# EAGLE board KGGR_M (EAGLE 9.4.2)
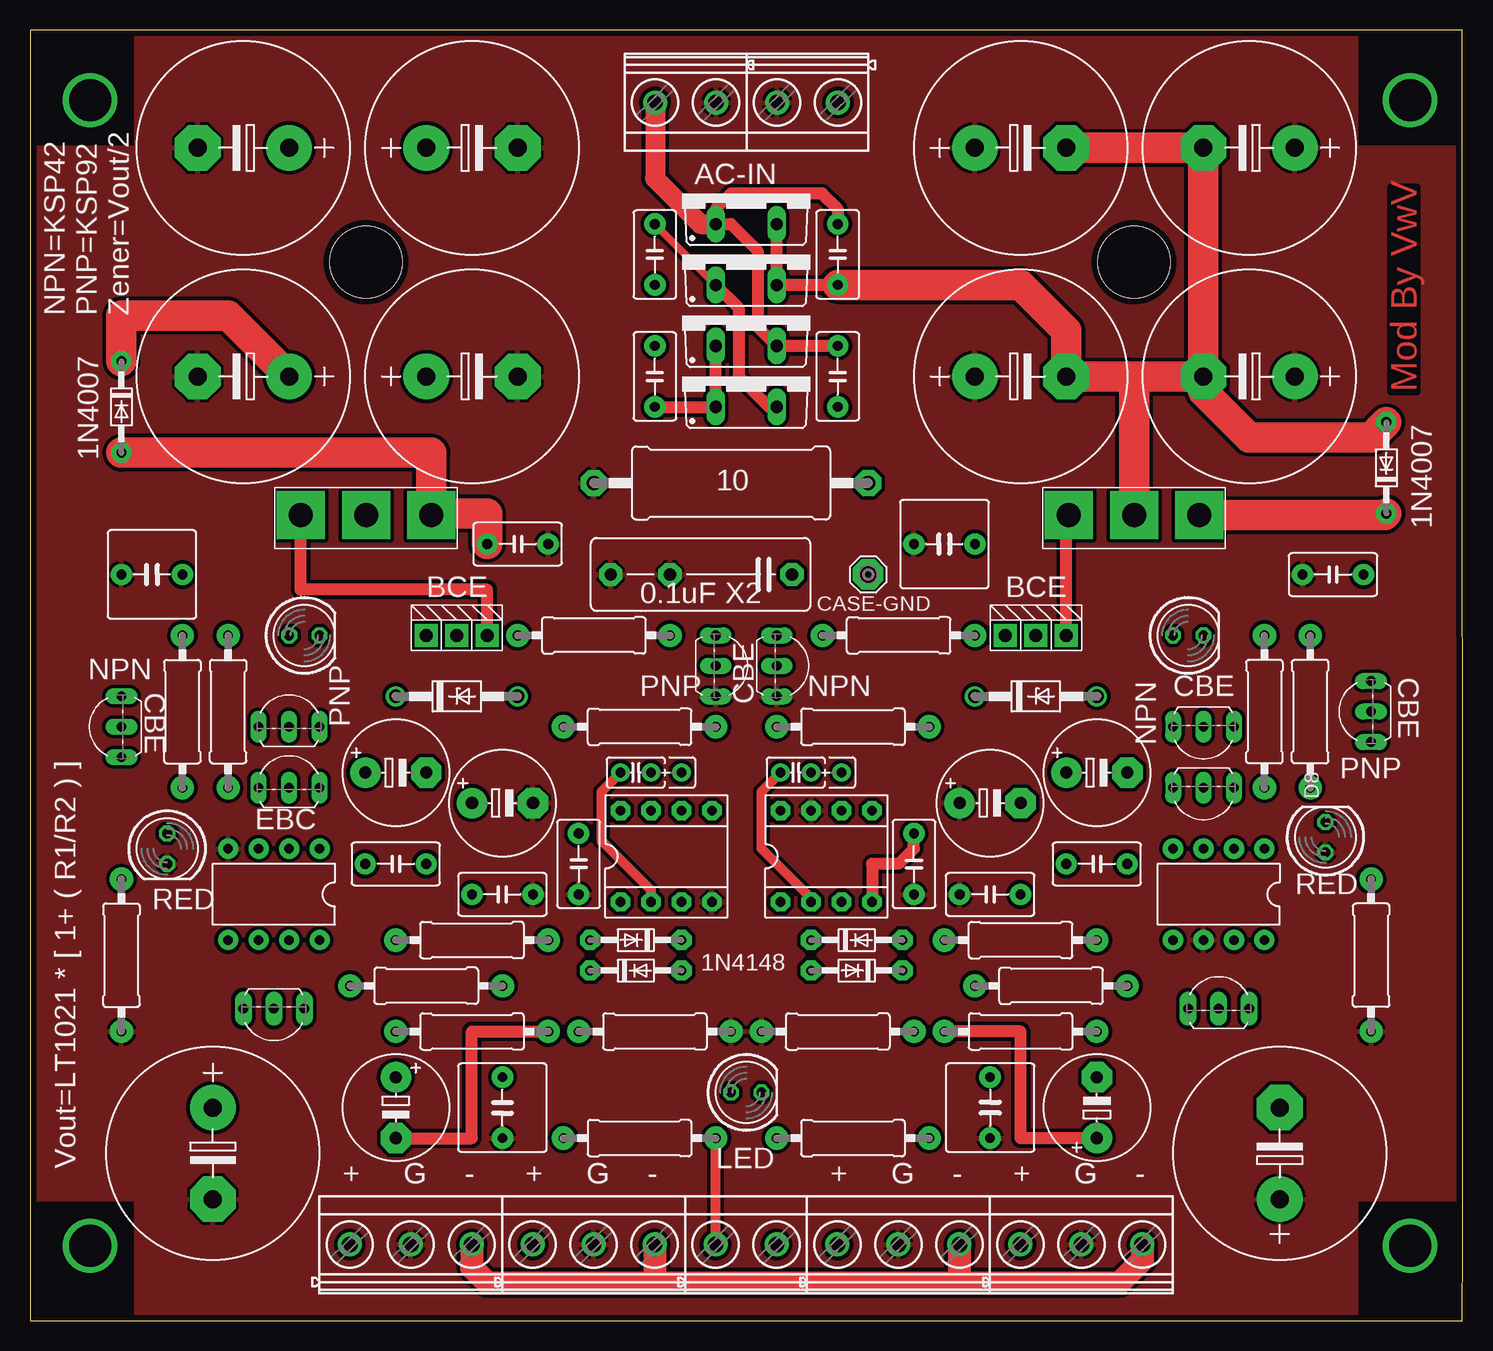
[diagram p0: board, top side]
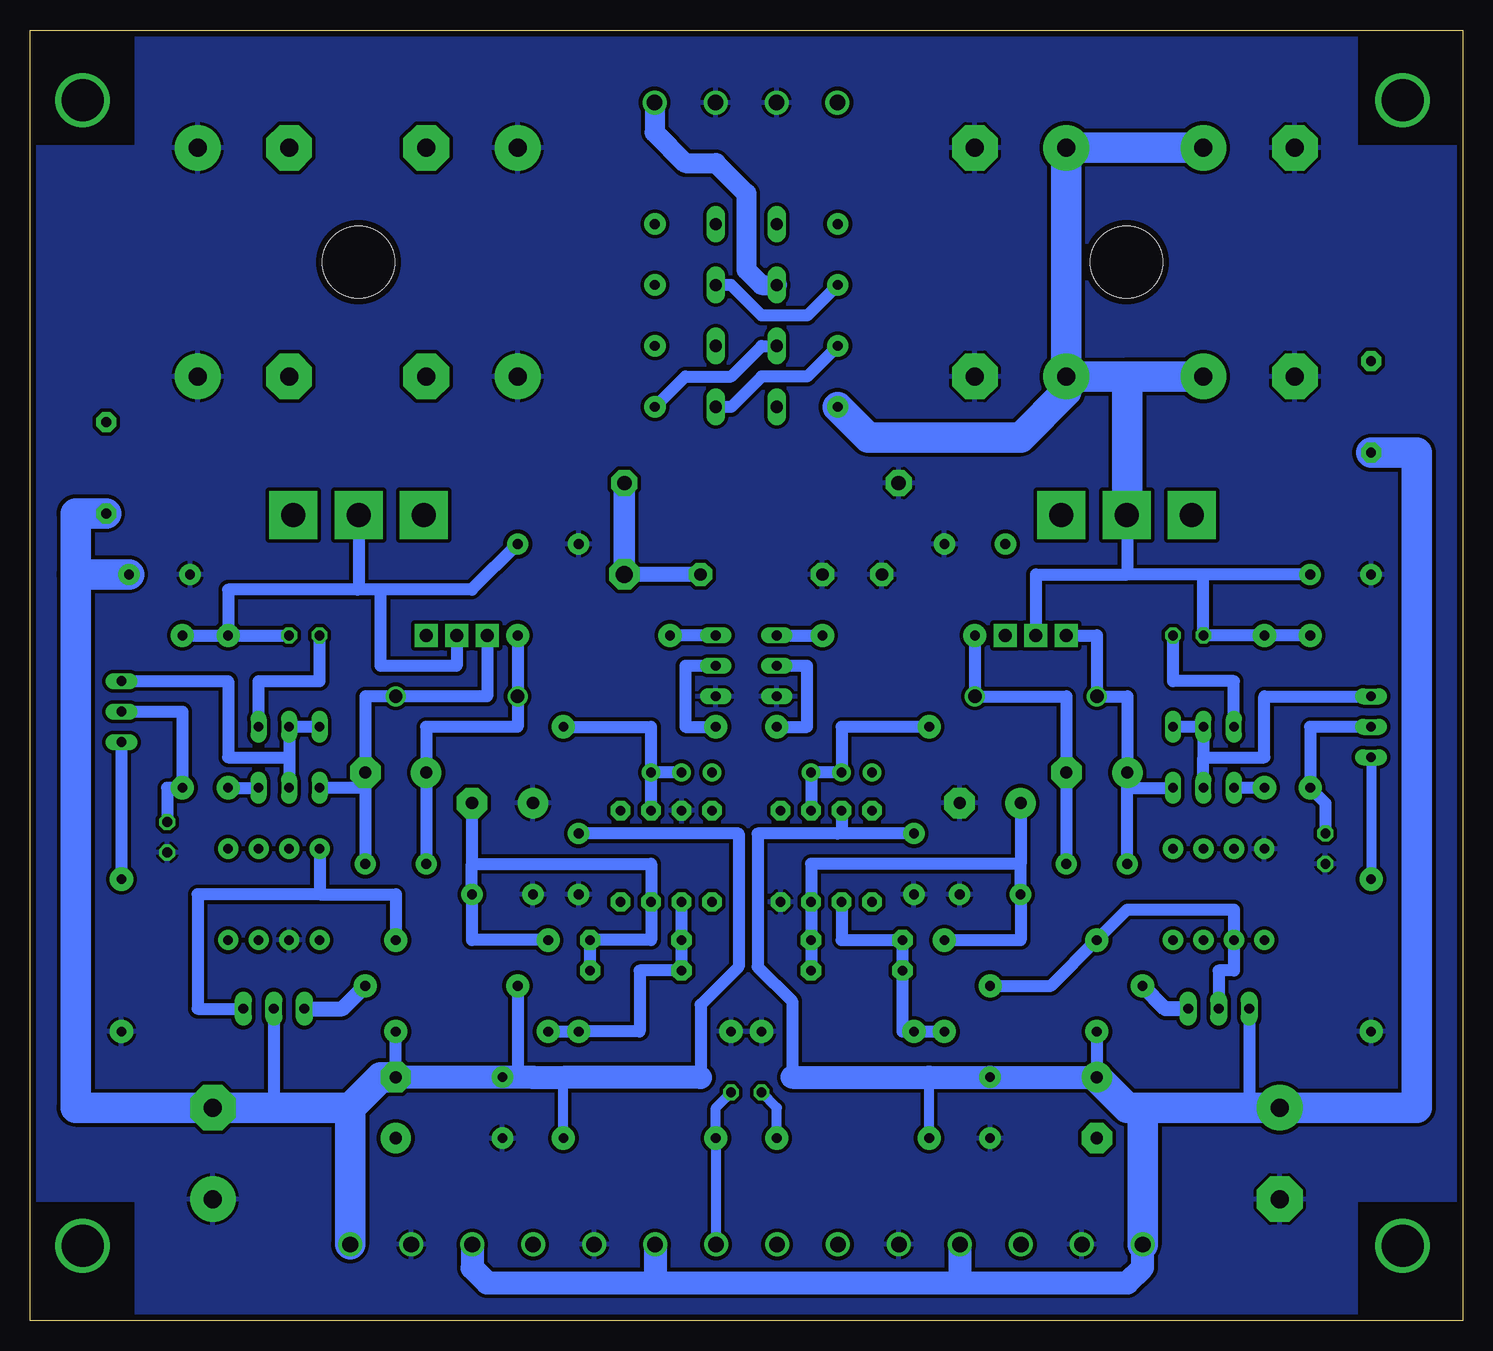
[diagram p1: board, bottom side, seen from below]

Size 119.38 x 107.62 mm. Coordinates in mm from the lower left corner, seen from the top.
Outline: 0,0 119.36,0 119.38,6.35 119.36,107.62 0,107.62 0,0
Copper layers (1*16): Top 0.035mm / dielectric 1.5mm / Bottom 0.035mm
Design rules "default *": minimum track width 10mil, minimum drill 24mil, track to track 12mil, track to pad 12mil, pad to pad 8mil, via to via 8mil, smd to smd 8mil, copper to edge 20mil, drill to drill 8mil, minimum pad ring 10mil, minimum via ring 8mil, stop-mask expansion 4mil, vias tented up to drill 0mil, thermal gap 10mil
Holes 6 mm at 28,88.27 92,88.27

## Footprints (pad centres in the part's own frame; a part is rotated, then mirrored left to right if it is on the bottom)
E7,5-18 = drill 1.5 pad 3.81: + -3.81,0 | drill 1.5 pad 3.81 octagon: - 3.81,0
E5-8,5 = drill 1.016 pad 2.54: + -2.54,0 | drill 1.016 pad 2.54 octagon: - 2.54,0
C025_050-025X075 = drill 0.813 pad 1.524: 1 -1.27,0; 2 1.27,0; 3 3.81,0
C050-035X075 = drill 0.813 pad 1.778: 1 -2.54,0; 2 2.54,0
C050-075X075 = drill 0.813 pad 1.778: 1 -2.54,0; 2 2.54,0
C102_152-062X184 = drill 1.016 pad 1.93 octagon: 1 -5.08,0; 2 5.08,0; 3 10.033,0
SE14 = drill 1.397 pad 2.54 octagon: MP 0,0
LED5MM = drill 0.813 octagon: A -1.27,0; K 1.27,0
1N4148 = drill 0.813 pad 1.676 octagon: A 3.81,0; C -3.81,0
DO41Z10 = drill 1.118: A 5.08,0; C -5.08,0
DIL08 = drill 0.813 pad 1.676: 1 -3.81,-3.81; 2 -1.27,-3.81; 3 1.27,-3.81; 4 3.81,-3.81; 5 3.81,3.81; 6 1.27,3.81; 7 -1.27,3.81; 8 -3.81,3.81
TO220ACS = drill 1.016 long: A 2.54,-2.54; C -2.54,-2.54
DIL08' = drill 0.813 pad 1.6 octagon: 1 -3.81,-3.81; 2 -1.27,-3.81; 3 1.27,-3.81; 4 3.81,-3.81; 5 3.81,3.81; 6 1.27,3.81; 7 -1.27,3.81; 8 -3.81,3.81
TO92-EBC = drill 0.813 long: B 0,-1.27; C 2.54,-1.27; E -2.54,-1.27
TO-264 = drill 2 pad 4 square: B -5.45,-6.096; C 0,-6.096; E 5.45,-6.096
TO220KG = drill 1.1 pad 1.93 square: 1 -2.54,0; 2 0,0; 3 2.54,0
TO92- = drill 0.813 pad 1.422 long: 1 2.54,0; 2 0,0; 3 -2.54,0
0309/12 = drill 0.813 pad 1.93: 1 -6.35,0; 2 6.35,0
0617/22 = drill 1.2 pad 2.184 octagon: 1 -11.43,0; 2 11.43,0
MKDSN1,5/3-5,08 = drill 1.3 pad 2: 1 -7.641,0.025; 2 -2.561,0.025; 3 2.519,0.025
MKDSN1,5/2-5,08 = drill 1.3 pad 2: 1 -2.561,0.025; 2 2.519,0.025

## Placement (x,y rotation side)
C1  [E7,5-18]  17.78,78.74 180 top
C2  [E7,5-18]  82.55,78.74 0 top
C3  10uF  [E5-8,5]  88.9,17.78 90 top
C4  47p  [C025_050-025X075]  63.82,45.72 0 top
C5  47p  [C025_050-025X075]  50.48,45.72 0 top
C6  [E7,5-18]  15.24,13.97 270 top
C7  47uF  [E5-8,5]  30.48,45.72 0 top
C8  47uF  [E5-8,5]  80.01,43.18 0 top
C9  47uF  [E5-8,5]  39.37,43.18 0 top
C10  [E7,5-18]  104.14,13.97 90 top
C11  [C050-035X075]  30.48,38.1 0 top
C12  [C050-035X075]  39.37,35.56 180 top
C13  47uF  [E5-8,5]  88.9,45.72 0 top
C14  [C050-035X075]  88.9,38.1 0 top
C15  [C050-035X075]  80.01,35.56 0 top
C16  10uF  [E5-8,5]  30.48,17.78 270 top
C17  4.7uF  [C050-075X075]  80.01,17.78 270 top
C18  4.7uF  [C050-075X075]  39.37,17.78 90 top
C19  [C050-035X075]  73.66,38.1 270 top
C20  [C050-035X075]  45.72,38.1 90 top
C21  [C050-035X075]  108.58,62.23 0 top
C22  [C050-075X075]  76.2,64.77 0 top
C23  [C050-075X075]  10.16,62.23 180 top
C24  [C050-035X075]  40.64,64.77 0 top
C25  [C050-035X075]  52.07,78.74 270 top
C26  [C050-035X075]  67.31,78.74 270 top
C27  [C050-035X075]  52.07,88.9 90 top
C28  [C050-035X075]  67.31,88.9 90 top
C29  [C102_152-062X184]  58.42,62.23 180 top
C30  [E7,5-18]  17.78,97.79 180 top
C31  [E7,5-18]  36.83,97.79 0 top
C32  [E7,5-18]  82.55,97.79 0 top
C33  [E7,5-18]  101.6,97.79 180 top
C34  [E7,5-18]  101.6,78.74 180 top
C35  [E7,5-18]  36.83,78.74 0 top
CASE-GND  SE14  [SE14]  69.85,62.23 0 top
D1  [LED5MM]  22.86,57.15 0 top
D2  [LED5MM]  96.52,57.15 0 top
D3  1N4148-V  [1N4148]  68.9,31.75 0 top
D4  1N4728  [DO41Z10]  35.56,52.07 0 top
D5  LT1021  [DIL08]  20.32,35.56 180 top
D6  1N4728  [DO41Z10]  83.82,52.07 0 top
D7  LT1021  [DIL08]  99.06,35.56 180 top
D8  [LED5MM]  107.95,40.32 90 top
D9  [LED5MM]  11.43,39.37 270 top
D10  1N4148-V  [1N4148]  113.03,71.12 90 top
D11  1N4148-V  [1N4148]  7.62,76.2 270 top
D12  1N4148-V  [1N4148]  68.9,29.21 180 top
D13  1N4148-V  [1N4148]  50.48,31.75 180 top
D14  1N4148-V  [1N4148]  50.48,29.21 0 top
D15  [LED5MM]  59.69,19.05 0 top
D16  MUR810  [TO220ACS]  59.69,78.74 0 top
D17  MUR810  [TO220ACS]  59.69,83.82 0 top
D18  MUR810  [TO220ACS]  59.69,88.9 0 top
D19  MUR810  [TO220ACS]  59.69,93.98 0 top
IC1  OPA134  [DIL08']  53.02,38.74 0 top
IC2  OPA134  [DIL08']  66.36,38.74 0 top
Q1  [TO92-EBC]  21.59,50.8 0 top
Q2  [TO92-EBC]  97.79,48.26 180 top
Q3  [TO92-EBC]  21.59,45.72 0 top
Q4  MJW21194  [TO-264]  28,73.27 0 top
Q5  MJE15031  [TO220KG]  83.82,57.15 0 top
Q6  [TO92-EBC]  58.42,54.61 270 top
Q7  MJW21193  [TO-264]  92,73.27 0 top
Q8  DN2540  [TO92-]  20.32,26.04 180 top
Q9  MJE15030  [TO220KG]  35.56,57.15 0 top
Q10\  [TO92-EBC]  97.79,43.18 180 top
Q11  [TO92-EBC]  63.5,54.61 270 top
Q12  DN2540  [TO92-]  99.06,26.04 0 top
Q13  [TO92-EBC]  110.49,50.8 90 top
Q14  [TO92-EBC]  6.35,49.53 90 top
R1  150  [0309/12]  16.51,50.8 270 top
R2  1k  [0309/12]  7.62,30.48 270 top
R3  10  [0309/12]  46.99,57.15 0 top
R4  150  [0309/12]  102.87,50.8 90 top
R5  1k  [0309/12]  111.76,30.48 90 top
R6  10  [0309/12]  72.39,57.15 0 top
R7  R2  [0309/12]  52.07,24.13 180 top
R8  R1  [0309/12]  36.83,24.13 180 top
R9  R11  [0309/12]  82.55,24.13 180 top
R10  R12  [0309/12]  67.31,24.13 180 top
R11  1k  [0309/12]  33.02,27.94 180 top
R12  1k  [0309/12]  85.09,27.94 0 top
R13  RLED  [0309/12]  50.8,15.24 180 top
R14  RLED  [0309/12]  68.58,15.24 180 top
R15  10k  [0309/12]  106.68,50.8 90 top
R16  10k  [0309/12]  12.7,50.8 270 top
R17  [0617/22]  58.42,69.85 180 top
R19  10  [0309/12]  50.8,49.53 0 top
R20  500  [0309/12]  36.83,31.75 180 top
R21  500  [0309/12]  82.55,31.75 0 top
R22  10  [0309/12]  68.58,49.53 180 top
X1  MKDSN1,5/3-5,08  [MKDSN1,5/3-5,08]  90.17,6.35 0 top
X2  MKDSN1,5/3-5,08  [MKDSN1,5/3-5,08]  74.93,6.35 0 top
X3  MKDSN1,5/3-5,08  [MKDSN1,5/3-5,08]  49.53,6.35 0 top
X4  MKDSN1,5/3-5,08  [MKDSN1,5/3-5,08]  34.29,6.35 0 top
X5  MKDSN1,5/2-5,08  [MKDSN1,5/2-5,08]  59.69,6.35 0 top
X6  MKDSN1,5/2-5,08  [MKDSN1,5/2-5,08]  54.61,101.6 180 top
X7  MKDSN1,5/2-5,08  [MKDSN1,5/2-5,08]  64.77,101.6 180 top

## Library data of the parts
C1-C35 R1-R17 R19-R22 = Vwvwbg
CASE-GND = solpad
D1 D2 D8 D9 D15 = led
D3 D4 D6 D10-D14 D16-D19 = diode
D5 D7 = linear-technology
IC1 IC2 = burr-brown; MF: TEXAS INSTRUMENTS; MPN: OPA134PA; OC_FARNELL: 1335032; OC_NEWARK: 75C4599
Q1-Q3 Q5 Q6 Q9 Q10\ Q11 Q13 Q14 = transistor
Q4 Q7 = TO264
Q8 Q12 = tranzistory FET
X1-X7 = con-phoenix-508

## Nets
AGND: C1.- C2.+ C6.- C8.+ C9.- C10.+ C12.1 C15.1 C17.2 C18.1 C19.2 C20.1 C21.1 C22.1 C23.2 C24.2 C29.2 C29.3 C30.- C31.- C32.+ C33.+ C34.+ C35.- D5.4 D7.6 D8.A D9.K IC1.4 IC2.7 Q6.C Q11.C R2.2 R5.1 R7.1 R10.2 R17.2 X1.2 X2.2 X3.2 X4.2 X6.1 X7.2
N$1: Q1.B Q1.C Q3.B Q14.C
N$2: D1.K Q1.E
N$3: Q3.E R1.2
N$4: C1.+ C23.1 C25.2 C26.2 C30.+ C31.+ C35.+ D1.A D11.C D16.C D17.C Q4.C Q9.2 R1.1 R16.1
N$5: C7.+ C11.1 D4.C Q3.C Q9.1
N$6: C7.- C11.2 D4.A R3.1
N$7: Q6.E R3.2
N$8: Q14.E R2.1
N$9: D9.A Q14.B R16.2
N$10: C8.- C15.2 D3.A D12.C IC2.3 R21.1
N$11: Q13.E R5.2
N$12: D8.K Q13.B R15.1
N$13: Q11.E R6.1
N$14: C13.+ C14.1 D6.C R6.2
N$15: C13.- C14.2 D6.A Q5.1 Q10\.C
N$16: Q2.B Q2.C Q10\.B Q13.C
N$17: Q5.3 Q7.B
N$18: Q10\.E R4.1
N$19: D2.A Q2.E
N$21: Q4.B Q9.3
N$22: C2.- C22.2 C27.1 C28.1 C32.- C33.- C34.- D2.K D10.A D18.A D19.A Q5.2 Q7.C R4.2 R15.2
N$23: C25.1 C27.2 D16.A D18.C X7.1
N$24: C5.2 C5.3 IC1.6 R19.1
N$25: C4.2 C4.3 IC2.6 R22.1
N$26: Q11.B R22.2
N$27: Q6.B R19.2
N$28: C5.1 C16.- D13.A D14.C IC1.2 R7.2 R8.1
N$29: Q12.3 R12.2
N$30: D5.6 Q8.2 R11.1 R20.2
N$31: C9.+ C12.2 D13.C D14.A IC1.3 R20.1
N$32: D15.K R14.2 X5.2
N$33: D7.4 Q12.1 R21.2
N$34: C3.+ C4.1 D3.C D12.A IC2.2 R9.2 R10.1
N$35: Q8.3 R11.2
N$36: D15.A R13.1 X5.1
N$38: C26.1 C28.2 D17.A D19.C X6.2
N$41: C29.1 CASE-GND.MP R17.1
V+: C6.+ C16.+ C18.2 C20.2 C24.1 D11.A IC1.7 Q4.E Q8.1 R8.2 R13.2 X1.1 X2.1 X3.1 X4.1
V-: C3.- C10.- C17.1 C19.1 C21.2 D10.C IC2.4 Q7.E Q12.2 R9.1 R12.1 R14.1 X1.3 X2.3 X3.3 X4.3

## Tracks (layer width: path | path; a pad name or v marks a point on that pad's centre or on a via)
AGND
  pour Top: 8.89,107.95 110.49,107.95 110.49,97.79 119.38,97.79 119.38,10.16 110.49,10.16 110.49,0 8.89,0 8.89,10.16 0,10.16 0,97.79 8.89,97.79
  pour Bottom: 0,97.79 8.89,97.79 8.89,107.95 110.49,107.95 110.49,97.79 119.38,97.79 119.38,10.16 110.49,10.16 110.49,0 8.89,0 8.89,10.16 0,10.16
N$1
  Bottom 1.016: Q3.B 21.59,46.99 | 21.59,46.99 16.51,46.99 16.51,52.07 Q14.C | 21.59,46.99 Q1.B Q1.C
N$2
  Bottom 1.016: Q1.E 19.05,53.34 24.13,53.34 D1.K
N$3
  Bottom 1.016: R1.2 Q3.E
N$4
  Top 1.016: D17.C D16.C C25.2
  Top 2.54: C1.+ 16.51,83.82 7.62,83.82 D11.C
  Bottom 1.016: R16.1 R1.1 D1.A 21.59,62.23 | Q9.2 35.56,62.23 27.94,62.23 | D17.C 58.42,81.28 60.96,78.74 64.77,78.74 C26.2 | 21.59,62.23 27.94,62.23 | C23.1 21.59,62.23 | 27.94,67.17 27.94,62.23
  Bottom 2.54: Q4.C 27.94,67.17 27.94,78.74 | C35.+ 27.94,78.74 | C35.+ C31.+ C30.+ | C1.+ 27.94,78.74 | C25.2 49.53,73.66 36.83,73.66 33.02,77.47 C35.+
N$5
  Bottom 1.016: Q9.1 30.48,57.15 D4.C 27.94,52.07 C7.+ | C7.+ 27.94,44.45 Q3.C | C11.1 C7.+
N$6
  Bottom 1.016: R3.1 D4.A 33.02,52.07 C7.- C11.2
N$7
  Bottom 1.016: Q6.E R3.2
N$8
  Bottom 0.813: Q14.E R2.1
N$9
  Bottom 1.016: D9.A 11.43,43.18 R16.2 12.7,49.53 Q14.B
N$10
  Bottom 1.016: C8.- 82.55,38.1 | D12.C D3.A 67.63,31.75 IC2.3 67.63,38.1 82.55,38.1 | R21.1 82.55,31.75 C15.2 82.55,38.1
N$11
  Bottom 1.016: Q13.E R5.2
N$12
  Bottom 1.016: Q13.B 106.68,50.8 R15.1 107.95,44.45 D8.K
N$13
  Bottom 1.016: Q11.E R6.1
N$14
  Bottom 1.016: R6.2 D6.C 78.74,49.53 86.36,49.53 C13.+ C14.1
N$15
  Bottom 1.016: Q5.1 81.28,52.07 D6.A 91.44,52.07 C13.- 91.44,44.45 | 91.44,44.45 Q10\.C | 91.44,44.45 C14.2
N$16
  Bottom 1.016: 97.79,46.99 Q2.B Q2.C | 97.79,46.99 Q10\.B | Q13.C 102.87,53.34 102.87,46.99 97.79,46.99
N$17
  Top 1.016: Q5.3 86.36,66.98 Q7.B
N$18
  Bottom 1.016: R4.1 Q10\.E
N$19
  Bottom 1.016: Q2.E 100.33,53.34 95.25,53.34 D2.A
N$20  (via drill 3.5)
  other vias: 5,101.77
N$21
  Top 1.016: Q9.3 38.1,60.96 22.55,60.96 Q4.B
N$22
  Top 1.016: D19.A D18.A C28.1
  Top 2.54: C32.- C33.- C34.- | C28.1 82.55,86.36 86.36,82.55 C2.- 91.44,78.74 | 91.44,78.74 C34.- | Q7.C 92,78.18 91.44,78.74 | D10.A 111.76,73.66 101.6,73.66 97.79,77.47 C34.-
  Bottom 1.016: C27.1 54.61,83.82 58.42,83.82 60.96,86.36 D18.A | R15.2 R4.2 | R4.2 D2.K | Q5.2 83.82,54.61 90.17,54.61 90.17,60.96 | R4.2 102.87,60.96 92.08,60.96 | 90.17,60.96 92.08,60.96 | C22.2 82.55,60.96 90.17,60.96 | Q7.C 92,61.04 92.08,60.96
N$23
  Top 0.61: C27.2 D18.C
  Top 1.016: D16.A 61.59,76.2 59.05,78.74 59.05,84.45 D18.C
  Bottom 1.016: C25.1 54.61,78.74 58.42,78.74 60.96,76.2 D16.A
  Bottom 1.676: X7.1 67.33,99.08 64.77,96.52 62.23,96.52 59.69,93.98 59.69,87.63 58.42,86.36 D18.C
N$24
  Bottom 1.016: R19.1 51.75,49.53 C5.2 C5.3 IC1.6
N$25
  Bottom 1.016: R22.1 67.63,49.53 C4.3 | C4.2 C4.3 | IC2.6 C4.3
N$26
  Bottom 1.016: Q11.B 64.77,54.61 64.77,49.53 R22.2
N$27
  Bottom 1.016: R19.2 54.61,49.53 54.61,54.61 Q6.B
N$28
  Top 0.813: IC1.2 51.75,35.88 47.62,40.01 47.62,44.13 C5.1
  Top 1.016: C16.- 36.83,15.24 36.83,24.13 R8.1
  Bottom 1.016: IC1.2 51.75,31.75 D13.A D14.C 46.67,24.13 R7.2 R8.1
N$29
  Bottom 1.27: Q12.3 93.34,26.04 R12.2
N$30
  Bottom 1.016: Q8.2 20.32,29.21 19.05,29.21 D5.6 19.05,34.29 27.94,34.29 R20.2 34.29,27.94 R11.1
N$31
  Bottom 1.016: D14.A D13.C IC1.3 54.29,38.1 36.83,38.1 | C9.+ 36.83,38.1 | R20.1 36.83,31.75 C12.2 36.83,38.1
N$32
  Bottom 0.813: D15.K 62.23,17.78 R14.2 62.21,15.22 X5.2
N$33
  Bottom 1.016: D7.4 95.25,35.56 | 95.25,35.56 88.9,35.56 R21.2 | 95.25,35.56 105.41,35.56 105.41,26.04 Q12.1
N$34
  Top 0.813: IC2.2 65.09,35.24 60.96,39.37 60.96,44.13 C4.1
  Top 1.016: C3.+ 82.55,15.24 82.55,24.13 R9.2
  Bottom 1.016: IC2.2 D3.C D12.A 68.58,29.21 68.58,24.13 R10.1 R9.2
N$35
  Bottom 1.27: Q8.3 24.77,26.04 R11.2
N$36
  Top 0.813: 57.15,6.4 R13.1
  Top 1.016: X5.1 57.15,6.4
  Bottom 0.813: R13.1 57.15,17.78 D15.A
N$37  (via drill 3.5 pad 1.1)
  other vias: 5,6.27
N$38
  Top 1.016: C26.1 D17.A 60.64,82.87 60.64,89.22 58.42,91.44 D19.C 57.15,92.71 58.42,93.98 66.04,93.98 67.31,92.71 C28.2
  Top 1.676: X6.2 52.09,95.27 52.07,95.25 55.88,91.44 D19.C
N$39  (via drill 3.5)
  other vias: 115,6.27
N$40  (via drill 3.5)
  other vias: 115,101.77
N$41
  Bottom 1.27: C29.1 CASE-GND.MP
  Bottom 1.778: R17.1 CASE-GND.MP
V+
  Top 2.54: D11.A 33.45,72.39 Q4.E 33.59,67.31 38.1,67.31 C24.1
  Bottom 0.813: R13.2 44.45,20.32
  Bottom 1.016: R8.2 C16.+ | Q8.1 17.78,17.78 | C20.2 52.07,40.64 | 52.07,40.64 58.74,40.64 58.74,29.53 55.88,26.67 55.88,20.32 | IC1.7 51.75,40.96 52.07,40.64
  Bottom 1.93: C16.+ C18.2 44.45,20.32 55.88,20.32 | C6.+ 17.78,17.78 26.67,17.78 26.67,7.64 X4.1 26.67,6.35 26.67,4.45 27.94,3.17 41.91,3.17 | X3.1 41.89,3.2 41.91,3.17 | X2.1 67.29,3.2 67.31,3.17 | 67.31,3.17 81.28,3.17 82.53,4.42 X1.1 | 67.31,3.17 41.91,3.17
  Bottom 2.54: D11.A 3.81,72.39 3.81,17.78 C6.+ 26.67,17.78 | 26.67,17.78 26.67,6.35 | 26.67,17.78 27.94,17.78 C16.+
V-
  Top 1.016: C19.1 73.66,39.37 72.39,38.1 70.17,38.1 IC2.4
  Top 1.93: X4.3 36.81,4.47 38.1,3.17 52.07,3.17 | 52.07,3.17 77.47,3.17 | 77.47,3.17 90.81,3.17 92.71,5.08 92.71,6.35 X1.3 | X2.3 77.45,3.2 77.47,3.17 | X3.3 52.05,3.2 52.07,3.17
  Top 2.54: D10.C 112.89,67.17 Q7.E
  Bottom 0.813: R14.1 74.93,20.3
  Bottom 1.016: 77.45,20.3 77.47,20.32 | Q12.2 99.06,17.78 | C3.- R9.1 | R12.1 78.74,20.32 | C19.1 60.33,40.64 60.33,29.53 63.5,26.35 63.5,20.3
  Bottom 1.93: 77.47,20.32 78.74,20.32 C17.1 C3.- | 92.71,17.78 99.06,17.78 C10.- | 77.45,20.3 74.93,20.3 63.5,20.3 | X1.3 92.71,6.38
  Bottom 2.54: 92.71,17.78 C10.- 115.57,17.78 115.57,62.23 | 92.71,17.78 92.71,6.38 | 92.71,17.78 90.17,20.32 C3.- | 115.57,62.23 115.57,67.31 D10.C | C21.2 115.57,62.23

## Text on the board
Top: Mod By VwV
tPlace: AC-IN | NPN=KSP42 / PNP=KSP92 / Zener=Vout/2 | 1N4007 | 10 | 1N4007 | 0.1uF X2 | BCE | BCE | NPN | NPN | CBE | CBE | PNP | NPN | CBE | CBE | PNP | PNP | EBC | RED | RED | Vout=LT1021 * [ 1+ ( R1/R2 ) ] | LED | - | - | - | -
tNames: 1N4148 | + | G | + | G | + | G | + | G
tStop: Mod By VwV